# Altium PCB 8x8v2.PcbDoc (part 2 of 3)
Units mil, origin at the board's own origin, x right, y up, seen from the top; angles counter-clockwise.
Board outline 3661.42 x 3661.42 mil, 4 copper layers (Top Layer, VCC Plane, GND Plane, Bottom Layer), stack 30.635 mil thick; 389 components, 265 nets, 1171 pads, 321 vias.
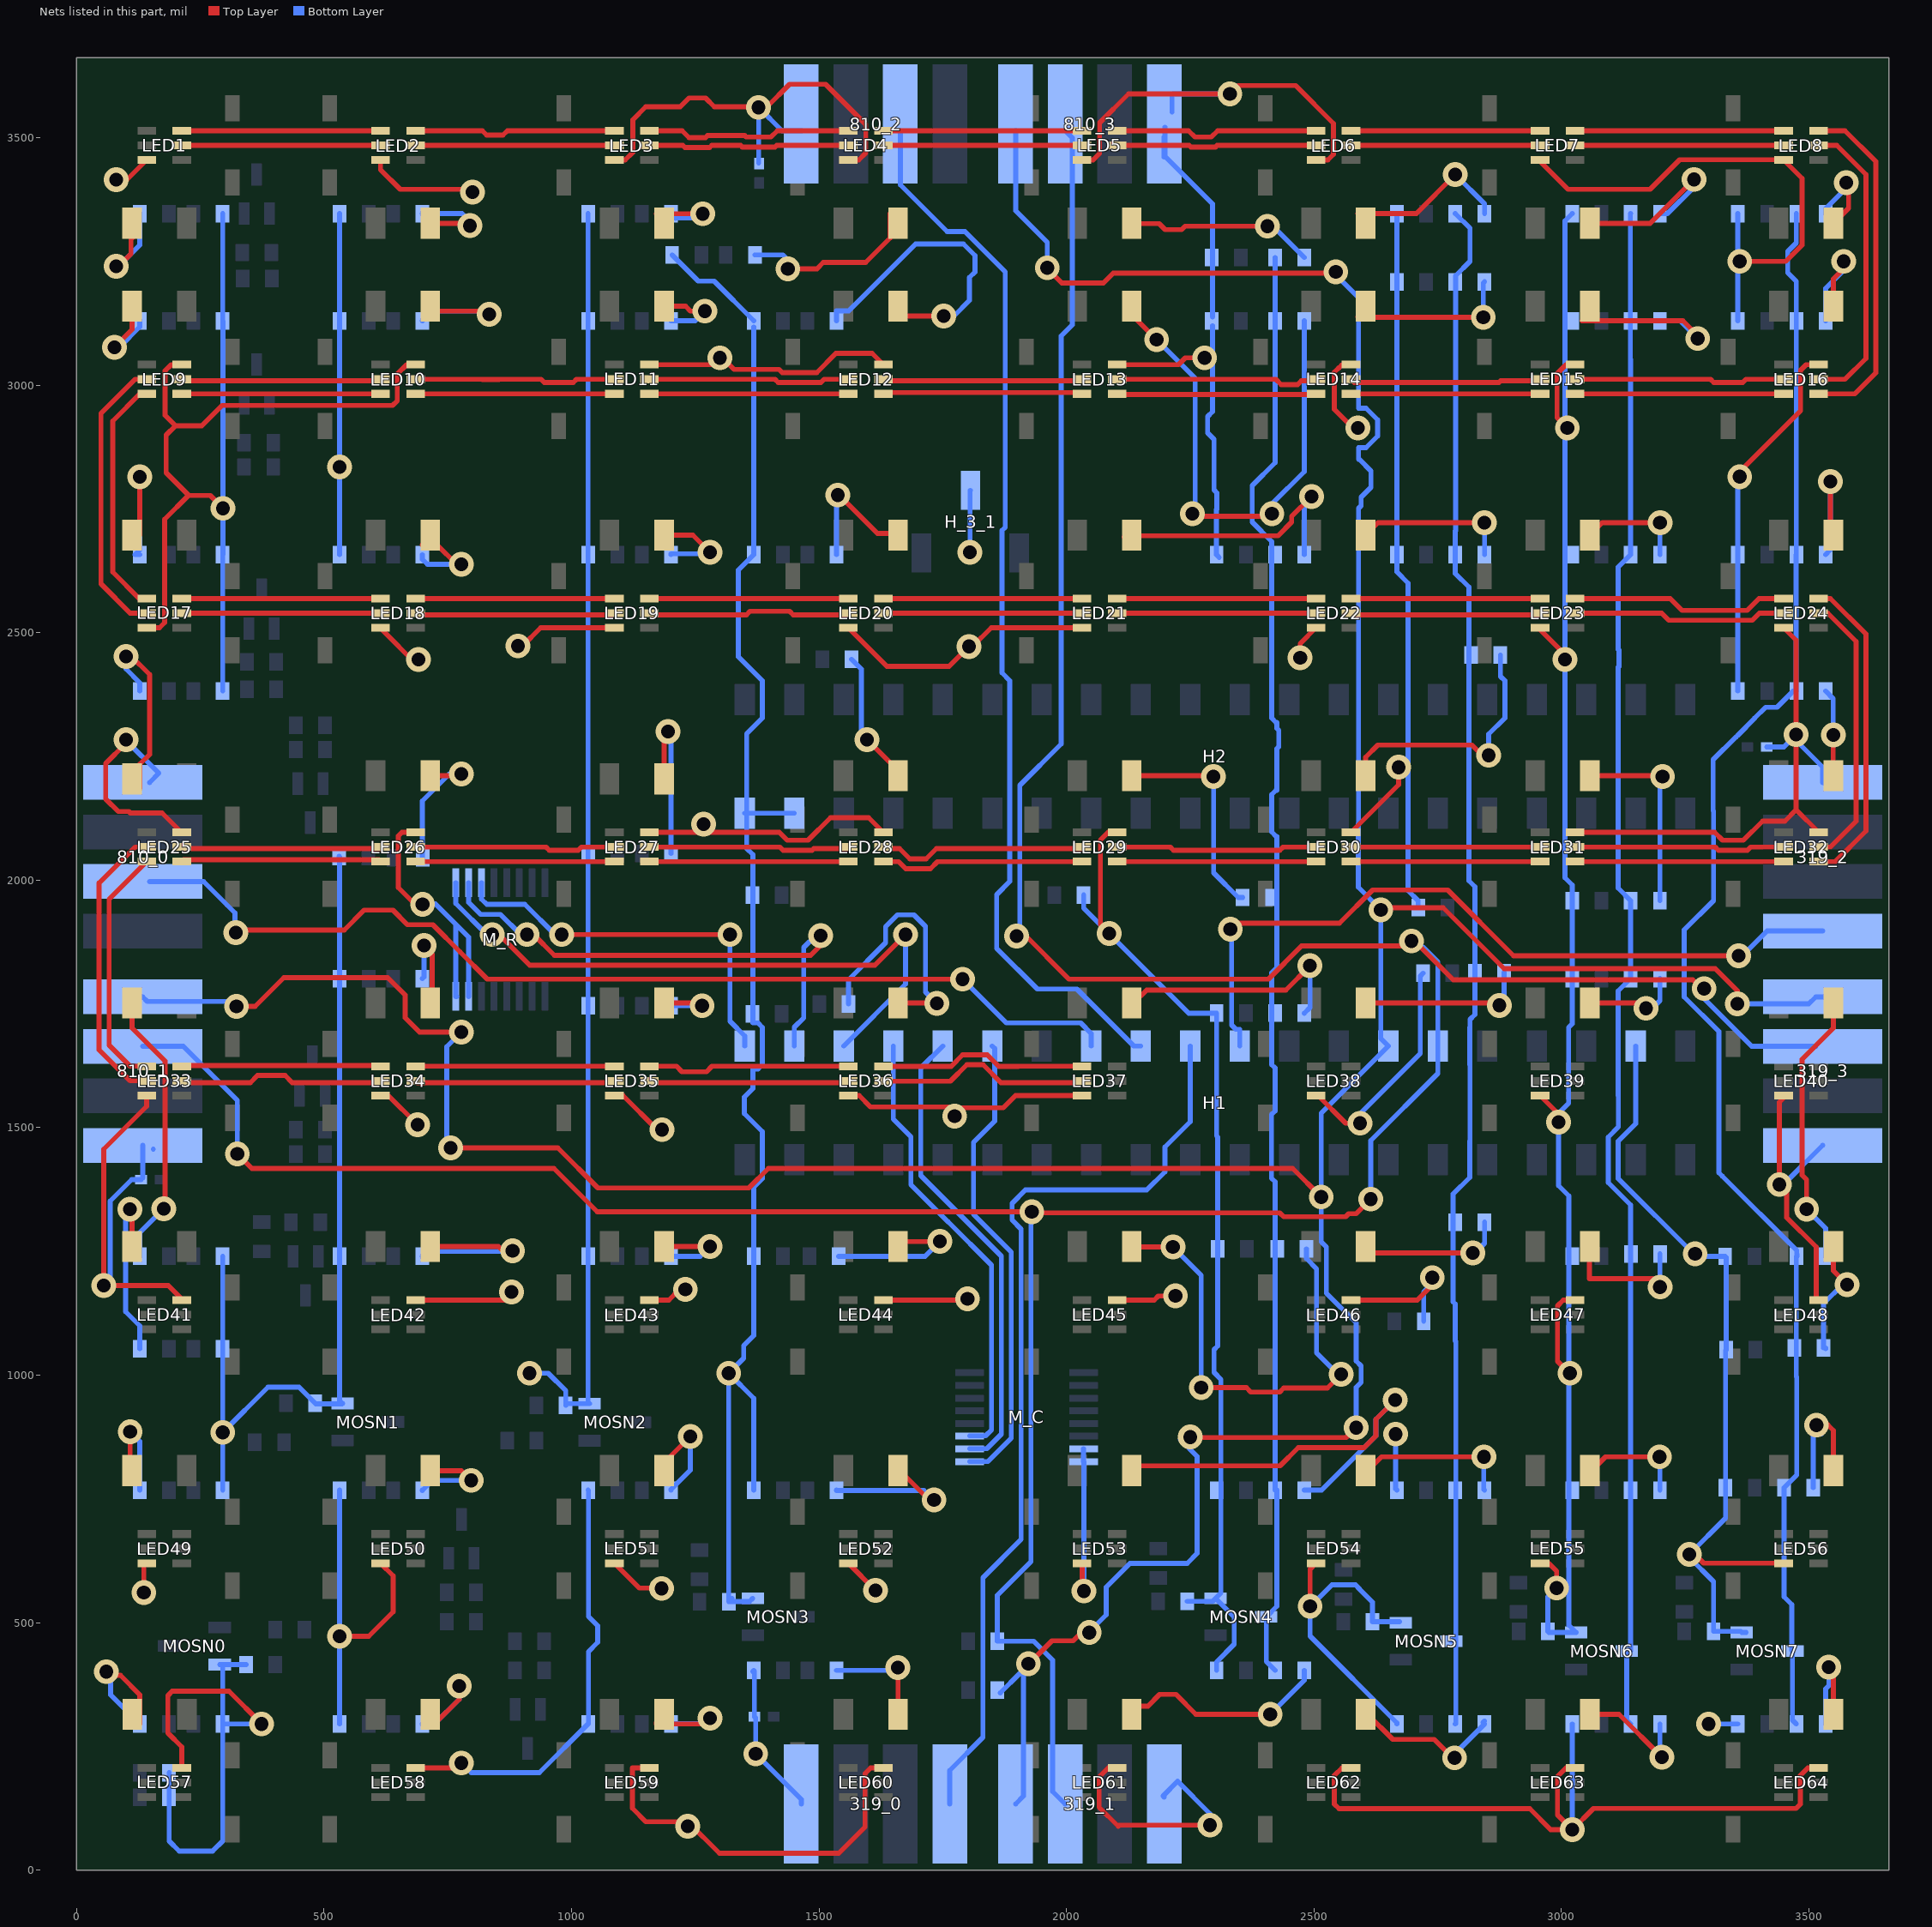
[diagram p4: the nets of this part, all layers, seen from the top]

## Via types
v1: diameter 50, hole 28, Top Layer to Bottom Layer, 321 vias

## Nets (pads, with @x,y where several pads share a name; then routed paths per layer and width w, separated by ;. In a path a pad name is that pad's centre, name@x,y a point inside that pad or via, vN(x,y) a via of type N, cw(c..) or ccw(c..) an arc to the next point about the centre after c; other vN are vias at no path point) (continued)
COL4: IR_R5.1 IR_R13.1 IR_R21.1 IR_R29.1 IR_R37.1 IR_R45.1 IR_R53.1 IR_R61.1 MOSN4.3 | length 2942.4
  Bottom Layer w10: IR_R61.1@2421.26,403.54 2403.54,421.26 MOSN4.3@2403.54,511.81 2425,533.27 2425,767.72 IR_R53.1@2421.26,767.72 2421.26,1390.53 2414,1397.79 2414,1526.57 2421.26,1533.83 2421.26,1620.53 2414.5,1627.29 2414.5,1812.93 2425,1823.43 2425,2088.5 2423.29,2088.5 2414.5,2097.29 2414.5,2172.71 2423.29,2181.5 2425,2181.5 2425,2265.43 2429,2269.43 2429,2302.57 2425,2306.57 2425,2318.5 2423.29,2318.5 2414.5,2327.29 2414.5,2683.93 2375,2723.43 2375,2796.86 2421.26,2843.12 IR_R5.1@2421.26,3257.87
COL5: IR_R6.1 IR_R14.1 IR_R22.1 IR_R30.1 IR_R38.1 IR_R46.1 IR_R54.1 IR_R62.1 MOSN5.3 | length 3125.8
  Bottom Layer w10: MOSN5.3@2777.56,462.6 MOSN5.3@2786.38,471.42 ; IR_R62.1@2785.43,295.28 2786.38,296.22 MOSN5.3@2786.38,471.42 ; IR_R6.1@2785.43,3346.46 2815,3316.89 2815,3250 2786,3221 2786,2706 2785.43,2705.43 IR_R22.1@2785.43,2657.48 2785.43,2619.57 2813,2592 2813,1998.79 2825,1986.79 2825,1728.43 2815,1718.43 2815,1703.21 2814.5,1702.71 2814.5,1627.29 2815,1626.79 2815,1473.21 2814.5,1472.71 2814.5,1399.5 2781,1366 2781,1148.02 2785.43,1143.58 2785.43,1069.1 2786.38,1068.16 MOSN5.3@2786.38,471.42
COL6: IR_R7.1 IR_R15.1 IR_R23.1 IR_R31.1 IR_R39.1 IR_R47.1 IR_R55.1 IR_R63.1 MOSN6.3 | length 3118.2
  Bottom Layer w10: MOSN6.3@3131.89,442.91 3131.89,303.15 IR_R63.1@3139.76,295.28 ; IR_R39.1@3139,1801.94 IR_R39.1@3139.76,1801.18 ; IR_R39.1@3139.13,1800.55 IR_R39.1@3139.76,1801.18 ; MOSN6.3@3139.76,442.91 IR_R55.1@3139.76,767.72 3139.76,1343.74 3094.5,1389 3094.5,1481 3115,1501.5 3115,1564.14 3114.5,1564.64 3114.5,1775.92 IR_R39.1@3139.76,1801.18 ; IR_R7.1@3139,3345.69 IR_R7.1@3139.76,3346.46 IR_R7.1@3139,3345.69 ; IR_R7.1@3139,3345.69 3139,3052.43 3139.76,3051.67 IR_R23.1@3139.76,2657.48 3114.5,2632.22 3114.5,2466.07 3116,2464.57 3116,2431.43 3114.5,2429.93 3114.5,1983.93 IR_R31.1@3139.76,1958.66 IR_R39.1@3139.76,1801.18
COL7: IR_R8.1 IR_R16.1 IR_R24.1 IR_R32.1 IR_R40.1 IR_R48.1 IR_R56.1 IR_R64.1 MOSN7.3 | length 3293.2
  Bottom Layer w10: IR_R64.1@3474.41,295.28 3466.53,303.15 MOSN7.3@3466.53,442.91 3465.19,444.26 3465.19,536.38 3449.41,552.16 IR_R56.1@3449.41,772.72 3475,798.31 3475,996.57 3474.41,997.16 IR_R40.1@3474.41,1240.16 ; IR_R8.1@3474.41,3346.46 3474.41,3287.41 3457,3270 3457,3227 3474.41,3209.59 IR_R24.1@3474.41,2657.48 3473.77,2656.84 3473.77,2382.53 IR_R32.1@3474.41,2381.89 3468.06,2381.89 3435.35,2349.17 3412.17,2349.17 3390,2327 3390,2326.55 3357.29,2293.84 3352.45,2289 3352,2289 3306.46,2243.46 3306.46,2140.4 3307,2139.85 3307,1958.57 3248,1899.57 3248,1764.15 3318,1694.15 3318,1409 3325,1402 3475.13,1251.87 IR_R40.1@3475.38,1240.18
GND: 319_0.4 319_1.1 319_2.4 319_3.1 810_0.4 810_1.1 810_2.4 810_3.1 C1.1 C2.1 C3.1 C4.1 H1.2 H2.39 H2.40 H_3_1.2 LED1.GND LED2.GND LED3.GND LED4.GND LED5.GND LED6.GND LED7.GND LED8.GND LED9.GND LED10.GND LED11.GND LED12.GND LED13.GND LED14.GND LED15.GND LED16.GND LED17.GND LED18.GND LED19.GND LED20.GND LED21.GND LED22.GND LED23.GND LED24.GND LED25.GND LED26.GND LED27.GND LED28.GND LED29.GND LED30.GND LED31.GND LED32.GND LED33.GND LED34.GND LED35.GND LED36.GND LED37.GND LED38.GND LED39.GND LED40.GND LED41.GND LED42.GND LED43.GND LED44.GND LED45.GND LED46.GND LED47.GND LED48.GND LED49.GND LED50.GND LED51.GND LED52.GND LED53.GND LED54.GND LED55.GND LED56.GND LED57.GND LED58.GND LED59.GND LED60.GND LED61.GND LED62.GND LED63.GND LED64.GND M_C.7 M_C.8 M_R.7 M_R.8 MOSN0.2 MOSN1.2 MOSN2.2 MOSN3.2 MOSN4.2 MOSN5.2 MOSN6.2 MOSN7.2 PT_R1.1 PT_R2.1 PT_R3.1 PT_R4.1 PT_R5.1 PT_R6.1 PT_R7.1 PT_R8.1 PT_R9.1 PT_R10.1 PT_R11.1 PT_R12.1 PT_R13.1 PT_R14.1 PT_R15.1 PT_R16.1 PT_R17.1 PT_R18.1 PT_R19.1 PT_R20.1 PT_R21.1 PT_R22.1 PT_R23.1 PT_R24.1 PT_R25.1 PT_R26.1 PT_R27.1 PT_R28.1 PT_R29.1 PT_R30.1 PT_R31.1 PT_R32.1 PT_R33.1 PT_R34.1 PT_R35.1 PT_R36.1 PT_R37.1 PT_R38.1 PT_R39.1 PT_R40.1 PT_R41.1 PT_R42.1 PT_R43.1 PT_R44.1 PT_R45.1 PT_R46.1 PT_R47.1 PT_R48.1 PT_R49.1 PT_R50.1 PT_R51.1 PT_R52.1 PT_R53.1 PT_R54.1 PT_R55.1 PT_R56.1 PT_R57.1 PT_R58.1 PT_R59.1 PT_R60.1 PT_R61.1 PT_R62.1 PT_R63.1 PT_R64.1 Rcg0.2 Rcg1.2 Rcg2.2 Rcg3.2 Rcg4.2 Rcg5.2 Rcg6.2 Rcg7.2 ROUT0.1 ROUT1.1 | length 40333
  Top Layer w10: v1(80,3415) 102.01,3415 LED1.GND@141.74,3454.72 ; v1@98.43,2283.46 98.43,2275.15 59.06,2235.78 59.06,2163.83 84.34,2138.54 105.55,2138.54 108.27,2135.83 172.63,2135.83 212,2096.46 LED25.GND@212.6,2096.46 ; v1(136,561) 136,614.34 LED49.GND@141.74,620.08 ; LED33.GND@141.74,1564.96 141.74,1543.02 55,1456.28 v1(55,1181) 185.39,1181 212.6,1153.79 LED41.GND@212.6,1151.58 ; LED17.GND@141.74,2509.84 167.84,2509.84 178,2520 178,2728.74 226.2,2776.94 270.06,2776.94 v1(296,2751) ; LED57.GND@212.6,206.7 212.6,249.1 184.45,277.25 184.45,352.67 193.23,361.46 307.83,361.46 v1(374.02,295.28) ; LED9.GND@212.6,3041.34 191.34,3041.34 178.9,3028.9 178.9,2939.1 200,2918 ; 227,2776.94 181,2822.94 181,2899 200,2918 ; v1(531.5,472.44) 590.55,472.44 639.76,521.65 639.76,594.49 LED50.GND@614.18,620.08 ; LED18.GND@613.67,2509.33 691,2432 v1(691,2446) ; LED34.GND@614.18,1564.96 629.92,1564.96 v1(688.98,1505.91) 688.98,1513.79 v1@687.02,1515.75 ; LED2.GND@614.18,3454.72 614.18,3435.04 653.86,3395.35 794.44,3395.35 800,3400.91 v1(800,3390) ; LED58.GND@685.04,206.7 767.72,206.7 v1(777.56,216.54) ; LED42.GND@685.04,1151.58 871.58,1151.58 879,1159 v1(879,1168) ; LED26.GND@685.04,2096.46 657.28,2096.46 650,2089.17 650,1985 684,1951 v1(699,1951) ; LED10.GND@685.04,3041.34 666.78,3041.34 647.88,3022.44 647.88,2968.19 638.58,2958.9 293.98,2958.9 253.09,2918 200,2918 ; v1(892,2473) 901,2473 937.84,2509.84 LED19.GND@1086.62,2509.84 ; LED51.GND@1086.62,620.08 1136.69,570 1175,570 1182,577 v1(1182,569) ; LED35.GND@1086.62,1564.96 1104.04,1564.96 1173,1496 v1(1183,1496) ; LED3.GND@1086.62,3454.72 1108.5,3454.72 1123.78,3470 1123.78,3535.78 1150,3562 1219.43,3562 1237.43,3580 1270.57,3580 1288.57,3562 1395.12,3562 1440.64,3607.52 1513.11,3607.52 1594.49,3526.14 1594.49,3469 1580.21,3454.72 LED4.GND@1559.06,3454.72 ; LED59.GND@1157.48,206.7 1123,206.7 1123,125 1150,98 1235,98 1298.79,34.21 1540.21,34.21 1593,87 1593,195.36 1604.33,206.7 LED60.GND@1629.92,206.7 ; LED43.GND@1157.48,1151.58 1196.58,1151.58 1218,1173 v1(1230,1173) ; LED27.GND@1157.48,2096.46 1419.73,2096.46 1435.72,2080.47 1477.67,2080.47 1523.2,2126 1600.38,2126 LED28.GND@1629.92,2096.46 ; LED11.GND@1157.48,3041.34 1299.22,3041.34 1300,3042.13 v1(1300,3055) 1305.24,3055 1328.42,3031.81 1419.42,3031.81 1425.87,3025.35 1495.28,3025.35 1534.14,3064.22 1607.04,3064.22 LED12.GND@1629.92,3041.34 ; LED52.GND@1559.06,620.08 v1(1614.17,564.96) ; LED36.GND@1559.06,1564.96 1581.04,1564.96 1604,1542 v1@1776,1542 ; LED20.GND@1559.06,2509.84 1637,2431.9 1762.9,2431.9 v1(1803,2472) 1810,2472 1847.84,2509.84 LED21.GND@2031.5,2509.84 ; LED44.GND@1629.92,1151.58 1797.58,1151.58 v1(1800,1154) ; v1@1768,1523.39 v1@1776,1531.39 ; v1@1774,1529.39 v1(1774,1523) 1774,1524.77 v1@1776,1526.77 ; v1@1782.23,1533 1789.23,1540 1872.16,1540 1897.12,1564.96 LED37.GND@2031.5,1564.96 ; LED53.GND@2031.5,620.08 2031.5,588.5 2040,580 2035,575 v1(2035,564) ; LED5.GND@2031.5,3454.72 2053.65,3454.72 2066.93,3468 2066.93,3529.93 2125,3588 v1(2330,3588) 2347,3605 2463,3605 2539.37,3528.63 2539.37,3466 2528.09,3454.72 LED6.GND@2503.94,3454.72 ; v1(2086,1892) 2068.66,1909.34 2068.66,2081.02 2084.1,2096.46 LED29.GND@2102.36,2096.46 ; LED61.GND@2102.36,206.7 2084.1,206.7 2066,188.59 2066,126.91 2104.33,88.58 2106.75,91 v1(2290,91) ; LED45.GND@2102.36,1151.58 2177,1151.58 2185.42,1160 v1(2220,1160) ; LED13.GND@2102.36,3041.34 2226.22,3041.34 2239.88,3055 v1(2279,3055) ; v1(2472,2449) 2472,2477.9 LED22.GND@2503.94,2509.84 ; v1(2492,533) 2492,608.14 LED54.GND@2503.94,620.08 ; LED38.GND@2503.94,1564.96 2507.94,1564.96 2563.9,1509 v1(2593,1509) ; LED62.GND@2574.8,206.7 2556.54,206.7 2541.1,191.25 2541.1,133.55 2550.4,124.25 2935.75,124.25 2978,82 v1(3021.65,82) ; LED46.GND@2574.8,1151.58 2708.58,1151.58 2745,1188 2739,1194 v1(2739,1197) ; LED14.GND@2574.8,3041.34 2556.96,3041.34 2550.31,3034.69 2549.89,3034.69 2541.1,3025.9 2541.1,3025.48 2541,3025.38 2541,2951.13 v1@2594.56,2897.56 ; LED30.GND@2576.46,2096.46 LED30.GND@2574.8,2096.46 2671,2192.66 v1(2671,2228) ; LED55.GND@2956.7,620.08 2974,620.08 2990,604.08 v1(2990,570) ; LED39.GND@2956.7,1564.96 2994,1527.65 v1(2994,1511) ; LED23.GND@2956.7,2509.84 2956.7,2505.8 3007,2455.5 v1(3007,2446) ; LED7.GND@2956.7,3454.72 2956.7,3451.66 3013,3395.35 3178.82,3395.35 3238.82,3455.35 3448.19,3455.35 LED8.GND@3448.82,3454.72 3486,3417.54 3486,3283 3453,3250 v1(3360,3250) ; v1(3011.81,2913.39) 2991,2934.2 2991,3023.04 3009.3,3041.34 LED15.GND@3027.56,3041.34 ; v1(3017,1004) 3016,1004 2992,1028 2992,1140 3003.58,1151.58 LED47.GND@3027.56,1151.58 ; LED63.GND@3027.56,206.7 3009.3,206.7 2992,189.4 2992,111.65 v1(3021.65,82) ; LED31.GND@3027.56,2096.46 3309.49,2096.46 3325.48,2080.47 3367.43,2080.47 3406.3,2119.33 3451.19,2119.33 3474,2142.14 ; v1@3248.03,639.76 3267.71,639.76 3287.4,620.08 LED56.GND@3448.82,620.08 ; v1@3343.83,2809 3483,2948.17 3483,3030 3494.34,3041.34 LED16.GND@3519.68,3041.34 ; LED40.GND@3448.82,1564.96 3448.82,1560.2 3440,1551.38 v1(3440,1385) 3455,1370 3455,1318.43 3514.53,1258.9 3514.53,1156.73 LED48.GND@3519.68,1151.58 ; LED24.GND@3448.82,2509.84 3474,2484.66 v1(3474,2294) 3474,2142.14 ; LED64.GND@3519.68,206.7 3497.7,206.7 3482.52,191.52 3482.52,133.55 3473.74,124.76 3064.41,124.76 v1(3021.65,82) ; LED32.GND@3519.68,2096.46 3474,2142.14
  Bottom Layer w10: v1(55,1181) 68,1194 68,1351.57 111.43,1395 C3.1@130.32,1395 133.86,1398.54 810_1.1@133.86,1464.17 ; v1@98.43,2283.46 98.83,2283.46 166.35,2215.95 810_0.4@147.64,2197.24 ; ROUT0.1@187.01,196.85 187.01,59.06 207.32,38.74 274.96,38.74 275.59,39.37 295.28,59.05 PT_R57.1@295.28,295.28 ; MOSN0.2@289.37,415.36 MOSN0.2@295.28,415.36 ; PT_R49.1@295.28,767.72 v1(295.27,884.27) ; PT_R41.1@295.27,1053.15 v1(295.27,884.27) ; PT_R41.1@295.28,1053.15 PT_R33.1@295.28,1240.16 ; PT_R25.1@295.28,2381.89 PT_R17.1@295.28,2657.48 296,2658.2 v1(296,2751) 296,3129.2 PT_R9.1@295.28,3129.92 PT_R1.1@295.28,3346.46 ; Rcg0.2@342.52,415.35 MOSN0.2@295.28,415.36 ; v1(374.02,295.28) PT_R57.1@295.28,295.28 ; PT_R26.1@530.47,2048 531.49,2046.98 PT_R42.1@531.5,1240.16 531.49,948.82 MOSN1.2@537.4,942.91 536.28,941.79 483.41,941.79 449.57,975.63 386.63,975.63 v1(295.27,884.27) ; PT_R58.1@531.5,295.28 v1(531.5,472.44) ; 531.5,631.5 v1(531.5,472.44) ; PT_R50.1@531.5,767.72 v1(531.5,472.44) ; PT_R18.1@531.5,2657.48 v1(531.5,2834.65) PT_R10.1@531.5,3129.92 PT_R2.1@531.5,3346.46 ; v1(699,1951) 724.17,1951 725.17,1952 766.3,1910.87 ; M_R.8@766.3,1764.92 766.3,1910.87 ; v1(777.56,216.54) 797.24,196.85 935.04,196.85 PT_R59.1@1033.46,295.28 1034.09,295.91 1034.09,441.53 1053,460.43 1053,493.57 1034.09,512.47 1034.09,767.09 PT_R51.1@1033.46,767.72 ; M_R.7@792.3,1764.92 792.3,1884.87 766.3,1910.87 ; v1(915,1004) 953,1004 988.19,968.81 Rcg2.2@988.19,938.98 991.47,942.26 MOSN2.2@1036.42,942.26 1033.46,945.21 PT_R3.1@1033.46,3346.46 ; PT_R4.1@1203.11,3262.87 1255.83,3210.16 1287.87,3210.16 PT_R12.1@1368.11,3129.92 ; Rcg3.2@1324.27,549.21 Rcg3.2@1317.58,542.52 ; H2.40@1350,2135 H2.40@1354,2135 ; PT_R60.1@1366.14,401.57 PT_R60.1@1368.11,403.54 1369.32,402.34 C1.1@1369.32,310 1372,307.31 v1(1372,235) 1464.17,142.83 319_0.4@1464.17,133.86 ; MOSN3.2@1366.14,549.21 1359.45,542.52 Rcg3.2@1317.58,542.52 ; PT_R52.1@1368.11,767.72 1368.11,953.4 v1(1317.58,1003.94) ; PT_R12.1@1368.11,3117.59 PT_R20.1@1368.11,2657.48 1337,2626.37 1337,2451.21 1385.5,2402.71 1385.5,2327.29 1354,2295.79 H2.40@1354,2135 ; C4.1@1377.95,3448.69 v1(1377.95,3561) 1425.17,3513.78 810_2.4@1464.17,3513.78 ; H2.39@1450,2135 H2.40@1354,2135 ; v1(1805,2662) 1805,2786.58 H_3_1.2@1805.8,2787.39 ; M_C.7@2034.29,851.35 M_C.8@2034.29,825.35 2035,824.65 v1(2035,564) ; PT_R29.1@2034.53,1970 2034.53,1943.47 2246.82,1731.18 PT_R37.1@2303.15,1731.18 2303.15,1483.35 2305.5,1481 2305.5,1059.07 2298,1051.57 2298,1005.57 2312,991.57 2312,560.03 MOSN4.2@2301.18,549.21 ; 319_1.1@2197.24,147.64 2194.88,150 2224.41,179.53 2290,113.94 v1(2290,91) ; 810_3.1@2197.24,3460.48 810_3.1@2197.24,3501.24 ; 810_3.1@2199,3521 2199,3462 2295,3366 PT_R13.1@2295,3137.77 ; 810_3.1@2213,3551.43 2213,3584.57 2216.43,3588 v1(2330,3588) ; Rcg4.2@2244.09,543.31 2295.28,543.31 MOSN4.2@2301.18,549.21 ; PT_R13.1@2295,3119.96 2295,2946.57 2285,2936.57 2285,2903.43 2298,2890.43 2298,2788.1 2303.78,2782.32 2303.78,2749.18 2303,2748.4 2303,2657.48 2303.15,2657.48 PT_R21.1@2308.57,2652.06 ; PT_R61.1@2303.15,403.54 2303.15,420.71 2338.82,456.39 2338.82,511.57 MOSN4.2@2301.18,549.21 ; v1(2593,1509) 2586,1509 2580,1515 2714.5,1649.5 2714.5,1806.03 PT_R38.1@2720.47,1812 ; v1(2665,881) 2665,770.04 PT_R54.1@2667.32,767.72 ; PT_R62.1@2667.32,295.28 2667.32,297.53 2492,472.85 v1(2492,533) 2492.82,533 2536.07,576.25 2583.93,576.25 2592.72,567.47 2592.72,566.73 2618.11,541.34 Rcg5.2@2618.11,501.97 MOSN5.2@2672.71,501.97 ; PT_R6.1@2667.32,3346.46 PT_R22.1@2667.32,2657.48 2667.32,2622.68 2690,2600 2690,1979 2710.47,1958.53 PT_R30.1@2710.47,1945 ; PT_R46.1@2721.53,1109 2721.53,1168.1 v1@2745,1191.57 ; v1@2985.07,1519.93 3014.5,1549.35 3014.5,1702.71 3021.65,1709.87 3021.65,1990.13 3007,2004.79 v1(3007,2446) 3007,3331.8 PT_R7.1@3021.65,3346.46 ; v1(2990,570) 2972.44,552.44 Rcg6.2@2972.44,482.28 2974.41,480.31 MOSN6.2@3029.53,480.31 3015,494.84 3015,1362 2994,1383 v1(2994,1511) ; v1@3021.65,88.58 PT_R63.1@3021.65,295.28 ; H1.2@3150,1665 3150,1508.21 3114.5,1472.71 3114.5,1397.29 3266.79,1245 v1(3270,1245) 3275,1240 PT_R40.1@3330.47,1240 3332.6,1237.87 PT_R48.1@3332.6,1051.3 3331.3,1050 PT_R56.1@3331.3,772.72 3331.3,711.3 v1(3258,638) 3258,632 3307.08,582.92 Rcg7.2@3307.08,482.28 3362.2,482.28 MOSN7.2@3364.17,480.31 MOSN7.2@3373,480.31 ; v1(3297.24,295.28) PT_R64.1@3356.3,295.28 ; PT_R32.1@3356.3,2381.89 PT_R24.1@3356.3,2657.48 3356.3,2811.3 v1(3360,2815) ; PT_R16.1@3356.3,3129.92 PT_R8.1@3356.3,3346.46 ; C2.1@3414.69,2269 3449,2269 v1(3474,2294) 3474,2282 3527.56,2228.44 319_2.4@3527.56,2197.24 ; v1(3440,1385) 3448.39,1385 319_3.1@3527.56,1464.17 ; PT_R57.1@295.28,295.28 MOSN0.2@295.28,415.36 ; Rcg3.2@1317.58,542.52 v1(1317.58,1003.94) ; v1(1317.58,1003.94) 1347.8,1034.15 1347.8,1059.88 1368.11,1080.19 PT_R44.1@1368.11,1240.16 1368.11,1379.9 1385.5,1397.29 1385.5,1491.93 1349,1528.43 1349,1561.57 1366.47,1579.04 1366.47,1618.5 1376.71,1618.5 1385.5,1627.29 1385.5,1702.71 1376.71,1711.5 1366.47,1711.5 1366.47,2051.47 1354,2063.95 H2.40@1354,2135
  other v1: 1235,88.58 1267,2113 100,2283.46 2588.58,2913.39
I2C_1: 319_1.4 319_3.4 810_1.4 810_3.4 H1.7 R200.2 | length 8771.4
  Top Layer w10: v1(323,1745) 361,1745 419,1803 629,1803 664,1768 664,1722 693.09,1692.91 v1(777.56,1692.91) ; v1(756,1459) 972.1,1459 1053.15,1377.95 1358.27,1377.95 1397.64,1417.32 2457.18,1417.32 v1(2514.5,1360) ; v1@1907.99,417 v1(1923,417) ; v1@1909.5,403.5 1910,403 1970.54,463.54 2013.54,463.54 2030,480 v1(2046,480) ; v1(1961,3237) 1961,3235.54 1990.54,3206 2074.57,3206 2094.57,3226 2541,3226 v1(2544,3229) ; v1(2250,875) 2251,874 2565,874 v1(2585,894) ; v1(2635,1940) 2639,1944 2761,1944 2884,1821 3310.57,1821 3355,1776.57 v1(3355,1750)
  Bottom Layer w10: 810_1.4@133.86,1764.17 143.03,1755 326,1755 323,1752 v1(323,1745) ; v1(756,1459) 748.03,1466.97 748.03,1663.39 v1(777.56,1692.91) ; R200.2@1866.24,358.17 1905.61,397.54 ; 319_1.4@1897.24,133.86 1913.06,149.68 1913.06,417 v1(1923,417) ; 810_3.4@1897.24,3513.78 1897.24,3352.24 1961,3288.48 v1(1961,3237) ; v1@2038.33,474 2080,515.67 2080,571.57 2128.43,620 2244,620 2264,640 2264,836 2230,870 2235,875 v1(2250,875) ; v1(2544,3229) 2540.74,3229 2539.37,3227.63 2590,3177 2590,2953.39 2605.15,2953.39 2628.58,2929.95 2628.58,2896.82 2605.15,2873.39 2590,2873.39 2590,2850 2591.57,2850 2615,2826.57 2615,2793.43 2595,2773.43 2595,2756.21 2590,2751.21 2590,2114.65 2589.39,2114.04 2589.39,1985.61 v1(2635,1940) 2635,1680 H1.7@2650,1665 2514.5,1529.5 v1(2514.5,1360) 2514.5,1269.41 2525,1258.91 2525,1165.63 2585,1105.63 2585,1028.57 2595,1018.57 2595,985.43 2585,975.43 v1(2585,894) ; v1(3355,1750) 3499.61,1750 3513.78,1764.17 319_3.4@3527.56,1764.17
I2C_2: 319_1.3 319_3.3 810_1.3 810_3.3 H1.6 R201.2 | length 8039.4
  Top Layer w10: v1(324.8,1446.85) 354.33,1417.32 964.57,1417.32 1051.89,1330 v1(1930,1330) 1931.93,1328.07 2430.53,1328.07 2438.6,1320 2563.81,1320 2570.15,1326.34 2585.34,1326.34 v1(2614.5,1355.5) ; v1@1899,1893 1912,1893 2005,1800 2407.89,1800 2474.89,1867 2687,1867 v1(2697,1877) ; v1@2715,1865 2781.54,1798.46 3265.2,1798.46 3283.66,1780 3284.66,1781 v1(3288,1781)
  Bottom Layer w10: 810_1.3@133.86,1664.17 215.75,1664.17 324.8,1555.12 v1(324.8,1446.85) ; v1@1911,1894 1905.5,1899.5 1905.5,2191.5 1989,2275 1989,3099.36 2011.54,3121.9 2011.54,3499.49 810_3.3@1997.24,3513.78 ; v1(1930,1330) 1928.29,1328.29 1928.29,623.29 1860.24,555.24 R201.2@1860.24,462.6 1933.97,462.6 1972,424.57 1972,159.1 319_1.3@1997.24,133.86 ; v1(2614.5,1355.5) 2614.5,1473.93 2750,1609.43 H1.6@2750,1665 2750,1835.18 2720.18,1865 ; v1(3288,1781) 3288,1760.43 3384.26,1664.17 319_3.3@3513.78,1664.17
  other v1: 1899,1887
M_CS0: H1.17 M_C.11 | length 907.2
  Bottom Layer w10: H1.17@1650,1665 1650,1517 1685.5,1481.5 1685.5,1384.5 1760,1310 1760.57,1310 1848.29,1222.28 1848.29,889.14 1836.5,877.35 M_C.11@1804.29,877.35
M_CS1: H1.16 M_C.10 | length 946.2
  Bottom Layer w10: H1.16@1750,1665 1705.5,1620.5 1705.5,1403.08 1868.29,1240.29 1868.29,880.86 1838.79,851.35 M_C.10@1804.29,851.35
M_CS2: H1.15 M_C.9 | length 947.5
  Bottom Layer w10: M_C.9@1804.29,825.35 1841.07,825.35 1888.29,872.57 1888.29,1248.57 1812,1324.86 1812,1470.21 1855,1513.21 1855,1660 H1.15@1850,1665
M_RS0: H1.20 M_R.11 | length 802
  Top Layer w10: v1(980,1890) v1(1320,1890)
  Bottom Layer w10: M_R.11@818.3,1994.92 818.3,1961.7 829.08,1950.92 905.65,1950.92 966.57,1890 v1(980,1890) ; v1(1320,1890) 1320,1715 1350,1685 H1.20@1350,1665
M_RS1: H1.19 M_R.10 | length 1074.1
  Top Layer w10: v1(910,1890) 923.43,1890 965.43,1848 1483,1848 1503,1868 v1(1503,1888)
  Bottom Layer w10: M_R.10@792.3,1994.92 792.3,1954.92 816.3,1930.92 856.3,1930.92 897.22,1890 v1(910,1890) ; H1.19@1450,1665 1450,1702.76 1468.9,1721.66 1468.9,1863.9 1493,1888 v1(1503,1888)
M_RS2: H1.18 M_R.9 | length 1305.1
  Top Layer w10: v1(840,1890) 853.43,1890 915.43,1828 1613,1828 v1(1675,1890)
  Bottom Layer w10: M_R.9@766.3,1994.92 766.3,1952.64 828.94,1890 v1(840,1890) ; H1.18@1550,1665 1675,1790 v1(1675,1890)
Net319_0_1: 319_0.1 H1.11 | length 1891.2
  Bottom Layer w10: 319_0.1@1764.17,133.86 1764.17,201.6 1831,268.43 1831,590.84 1908.29,668.13 1908.29,1295.14 1890,1313.43 1890,1347 1917,1374 2162.21,1374 2199,1410.79 2199,1461 2250,1512 H1.11@2250,1665
Net319_2_1: 319_2.1 H1.10 | length 1561.1
  Top Layer w10: v1(2331,1901) 2331,1902 2342,1913 2551.43,1913 2618.43,1980 2770,1980 2903,1847 v1(3358,1847)
  Bottom Layer w10: v1(2331,1901) 2331,1902 2333.43,1904.43 2333.43,1707.25 2342.21,1698.46 2350,1698.46 H1.10@2350,1665 ; v1(3358,1847) 3365,1847 3415.24,1897.24 319_2.1@3527.56,1897.24
Net810_0_2: 810_0.2 H1.13 | length 2129.2
  Top Layer w10: v1@305.12,1899.61 305.75,1898.98 540.71,1898.98 581,1939.27 639.16,1939.27 668.43,1910 720,1910 775,1855 830,1800 v1(1790,1800)
  Bottom Layer w10: 810_0.2@147.64,1997.24 256.69,1997.24 320,1933.94 320,1914.49 v1@305.12,1899.61 ; v1(1790,1800) 1878.5,1711.5 2028.5,1711.5 2050,1690 H1.13@2050,1665
  other v1: 322,1894
Net810_2_2: 810_2.2 H1.12 | length 2153.4
  Bottom Layer w10: 810_2.2@1664.17,3513.78 1664.17,3404.72 1758.9,3310 1794.85,3310 1876,3228.85 1876,2712.65 1869.54,2706.2 1869.54,2418.67 1885.5,2402.71 1885.5,1997.29 1859,1970.79 1859,1862 1941,1780 2021,1780 2136,1665 H1.12@2150,1665
NetIR1_2: IR1.2 IR_R1.2 | length 244.9
  Top Layer w10: v1@85,3240 110,3265 110,3295 120.09,3305.09 112.2,3312.98 IR1.2@112.2,3326.77
  Bottom Layer w10: v1@73.67,3228.67 127.95,3282.95 IR_R1.2@127.95,3346.46
  other v1: 80,3240
NetIR2_2: IR2.2 IR_R2.2 | length 194.3
  Top Layer w10: IR2.2@714.57,3326.77 791.77,3326.77 795,3323.54 v1(795,3322)
  Bottom Layer w10: IR_R2.2@698.82,3346.46 778.54,3346.46 795,3330 v1(795,3322)
NetIR3_2: IR3.2 IR_R3.2 | length 167.2
  Top Layer w10: IR3.2@1171.26,3346.46 1171.26,3346 v1(1265,3346)
  Bottom Layer w10: IR_R3.2@1200.79,3346.46 IR_R3.2@1210.63,3336.62 ; IR_R3.2@1209.25,3338 1257,3338 v1(1265,3346)
NetIR4_2: IR4.2 IR_R4.2 | length 370.4
  Top Layer w10: v1(1437,3235) 1495.8,3235 1508.52,3247.72 1594.17,3247.72 1643.7,3297.24 IR4.2@1643.7,3346.46
  Bottom Layer w10: IR_R4.2@1370.43,3262.87 1427.13,3262.87 1437,3253 v1(1437,3235)
NetIR5_2: IR5.2 IR_R5.2 | length 380.6
  Top Layer w10: IR5.2@2135.83,3326.77 2136.46,3326.14 2187.3,3326.14 2199.43,3314 2232.57,3314 2239.57,3321 v1(2406,3321)
  Bottom Layer w10: v1(2406,3321) 2412.81,3321 2415,3323.19 IR_R5.2@2480.32,3257.87
NetIR6_2: IR6.2 IR_R6.2 | length 332.7
  Top Layer w10: IR6.2@2588.58,3346.46 2706.69,3346.46 v1(2785.43,3425.2)
  Bottom Layer w10: v1(2785.43,3425.2) 2844.49,3366.14 IR_R6.2@2844.49,3346.46
NetIR7_2: IR7.2 IR_R7.2 | length 354.4
  Top Layer w10: IR7.2@3057.09,3326.77 3179.13,3326.77 v1(3267.72,3415.35)
  Bottom Layer w10: IR_R7.2@3198.82,3346.46 3198.82,3346 3213.72,3346 3267.72,3400 v1(3267.72,3415.35)
NetIR8_2: IR8.2 IR_R8.2 | length 185.3
  Top Layer w10: IR8.2@3549.21,3326.77 3580,3357.56 3580,3398 3569,3409 v1(3575,3409)
  Bottom Layer w10: IR_R8.2@3533.46,3346.46 3533.46,3356.46 3575,3398 v1(3575,3409)
NetIR9_2: IR9.2 IR_R9.2 | length 169.5
  Top Layer w10: v1(76.38,3076.38) 112.2,3112.2 IR9.2@112.2,3159.45
  Bottom Layer w10: v1@81.47,3085 v1@84.24,3085 ; v1@87.77,3077.76 127.95,3117.95 IR_R9.2@127.95,3129.92
NetIR10_2: IR10.2 IR_R10.2 | length 228.9
  Top Layer w10: IR10.2@718.5,3159.45 728.35,3149.61 v1@816.93,3149.61
  Bottom Layer w10: IR_R10.2@698.82,3129.92 698.82,3130 698.9,3129.91 718.59,3149.61 v1@816.93,3149.61
  other v1: 834,3143
NetIR11_2: IR11.2 IR_R11.2 | length 172.2
  Top Layer w10: IR11.2@1190.94,3159.45 1230.32,3159.45 1240.16,3149.61 v1(1269.68,3149.61)
  Bottom Layer w10: IR_R11.2@1200.79,3129.92 1250,3129.92 v1(1269.68,3149.61) v1@1269.68,3137.28
NetIR12_2: IR12.2 IR_R12.2 | length 615.9
  Top Layer w10: IR12.2@1661.46,3139.76 v1(1751.97,3139.76)
  Bottom Layer w10: IR_R12.2@1535.43,3129.92 1535.43,3150 1560,3150 1695,3285 1791.57,3285 1815,3261.57 1815,3228.43 1804,3217.43 1804,3171 1772.76,3139.76 v1(1751.97,3139.76)
NetIR13_2: IR13.2 IR_R13.2 | length 1051.6
  Top Layer w10: IR13.2@2131.89,3159.45 2131.89,3142.11 v1(2182,3092) ; v1@2260,2735 2410,2735 v1(2415,2740)
  Bottom Layer w10: v1(2182,3092) 2260,3014 v1@2260,2735 ; v1(2415,2740) 2415,2760 2480.31,2825.31 IR_R13.2@2480.32,3129.92
  other v1: 2254,2740
NetIR14_2: IR14.2 IR_R14.2 | length 326.5
  Top Layer w10: IR14.2@2588.58,3138 2589.58,3137 v1(2842,3137)
  Bottom Layer w10: v1(2842,3137) 2842,3206.17 IR_R14.2@2844.49,3208.66
NetIR15_2: IR15.2 IR_R15.2 | length 343.2
  Top Layer w10: IR15.2@3041.34,3129.92 3041.34,3130 3245,3130 3275,3100 v1(3275,3094)
  Bottom Layer w10: IR_R15.2@3198.82,3129.92 3239.08,3129.92 v1(3275,3094)
NetIR16_2: IR16.2 IR_R16.2 | length 249.2
  Top Layer w10: IR16.2@3549.21,3159.45 3549.21,3214.57 3570,3235.35 v1(3570,3250)
  Bottom Layer w10: IR_R16.2@3533.46,3129.92 3533.47,3195.46 3582.67,3244.67 3577.34,3250 v1(3570,3250)
NetIR17_2: IR17.2 IR_R17.2 | length 289.5
  Top Layer w10: IR17.2@127.95,2696.85 v1(127.95,2814.96)
  Bottom Layer w10: IR_R17.2@127.95,2657.48 118.11,2657.48 123.03,2662.4 127.95,2667.32 v1(127.95,2814.96)
NetIR18_2: IR18.2 IR_R18.2 | length 215.3
  Top Layer w10: IR18.2@718.5,2696.85 698.82,2677.16 728.35,2677.16 767.72,2637.8 v1(777.56,2637.8)
  Bottom Layer w10: IR_R18.2@698.82,2657.48 698.82,2648 709.02,2637.8 v1(777.56,2637.8)
NetIR19_2: IR19.2 IR_R19.2 | length 197
  Top Layer w10: IR19.2@1190.94,2696.85 1245.15,2696.85 v1(1280,2662)
  Bottom Layer w10: IR_R19.2@1200.79,2657.48 1200.79,2659.25 v1@1280,2659.25 ; v1@1267.49,2662 v1(1280,2662)
NetIR20_2: IR20.2 IR_R20.2 | length 264
  Top Layer w10: v1(1538,2778) 1538,2774.46 1540,2772.46 1543,2775.46 1618.16,2700.3 IR20.2@1643.7,2700.3
  Bottom Layer w10: IR_R20.2@1535.43,2657.48 1535.43,2775.43 v1(1538,2778)
NetIR21_2: IR21.2 IR_R21.2 | length 543.1
  Top Layer w10: IR21.2@2116.14,2693.14 2118.75,2695.75 2427.32,2695.75 2455,2723.43 2455,2735 v1(2495,2775)
  Bottom Layer w10: IR_R21.2@2480.32,2657.48 2480.32,2760.32 v1(2495,2775)
NetIR22_2: IR22.2 IR_R22.2 | length 314.6
  Top Layer w10: IR22.2@2604.33,2696.85 2629.48,2722 v1(2844,2722)
  Bottom Layer w10: IR_R22.2@2844.49,2657.48 v1@2844.49,2722
NetIR23_2: IR23.2 IR_R23.2 | length 216.9
  Top Layer w10: IR23.2@3057.09,2696.85 3082.24,2722 v1(3199,2722)
  Bottom Layer w10: IR_R23.2@3198.82,2657.48 3199,2657.66 v1(3199,2722)
NetIR24_2: IR24.2 IR_R24.2 | length 260
  Top Layer w10: IR24.2@3543.31,2696.85 v1(3543.31,2805.12)
  Bottom Layer w10: IR_R24.2@3533.46,2657.48 3543.31,2667.32 v1(3543.31,2805.12)
NetIR25_2: IR25.2 IR_R25.2 | length 383
  Top Layer w10: v1(100,2452) 111,2452 147.64,2415.36 147.64,2253.94 127.95,2234.25 IR25.2@127.95,2185.04
  Bottom Layer w10: v1(100,2452) 100,2426.43 127.95,2398.47 IR_R25.2@127.95,2381.89
NetIR26_2: IR26.2 IR_R26.2 | length 298.8
  Top Layer w10: IR26.2@714.57,2211.06 774.06,2211.06 v1(777.56,2214.57) v1@759.57,2214.57
  Bottom Layer w10: IR_R26.2@698.82,2045 698.82,2160 753.39,2214.57 v1(777.56,2214.57)
NetIR27_2: IR27.2 IR_R27.2 | length 358.4
  Top Layer w10: IR27.2@1187.01,2204.72 v1@1187.01,2292.01 ; v1@1187.01,2305.53 v1@1187.01,2292.01 ; v1(1195,2300) v1@1187.01,2292.01
  Bottom Layer w10: IR_R27.2@1200.79,2053.66 v1@1200.79,2300
NetIR28_2: IR28.2 IR_R28.2 | length 269.1
  Top Layer w10: v1(1597,2284) 1659.45,2221.55 IR28.2@1659.45,2211.06
  Bottom Layer w10: IR_R28.2@1565.53,2446 1585.5,2426.03 v1@1585.5,2284
NetIR29_2: IR29.2 IR_R29.2 | length 439.8
  Top Layer w10: IR29.2@2131.89,2211.06 2291.94,2211.06 2294,2209 v1(2297,2209)
  Bottom Layer w10: v1(2297,2209) 2297,2014.79 2346.79,1965 IR_R29.2@2355.97,1965
NetIR30_2: IR30.2 IR_R30.2 | length 525
  Top Layer w10: IR30.2@2604.33,2211.06 2604.33,2248.33 2629,2273 2819,2273 2840,2252 v1(2853,2252)
  Bottom Layer w10: v1(2853,2252) 2853,2294.79 2885.5,2327.29 2885.5,2402.71 2876.53,2411.69 IR_R30.2@2876.53,2455
NetIR31_2: IR31.2 IR_R31.2 | length 400.3
  Top Layer w10: IR31.2@3057.09,2211.06 3201.94,2211.06 v1(3204,2209)
  Bottom Layer w10: IR_R31.2@3198.82,1958.66 3198.82,2203.82 v1(3204,2209)
NetIR32_2: IR32.2 IR_R32.2 | length 177.3
  Top Layer w10: v1(3549,2293) 3549,2211.28 IR32.2@3549.21,2211.06
  Bottom Layer w10: IR_R32.2@3533.46,2381.89 3549,2366.35 v1(3549,2293)
NetIR33_2: IR33.2 IR_R33.2 | length 560.5
  Top Layer w10: IR33.2@112.2,1751.97 112.2,1701.34 178.9,1634.65 178.9,1338.9 v1(176,1336)
  Bottom Layer w10: IR_R33.2@127.95,1240.16 127.95,1287.95 v1(176,1336)
NetIR34_2: IR34.2 IR_R34.2 | length 191
  Top Layer w10: v1(702,1868) 702,1866.89 718.5,1850.39 IR34.2@718.5,1751.97
  Bottom Layer w10: IR_R34.2@698.82,1801.18 702,1804.36 v1(702,1868)
NetIR35_2: IR35.2 IR_R35.2 | length 146
  Top Layer w10: IR35.2@1190.94,1751.97 1250.03,1751.97 1262,1740 1263.82,1741.82 v1(1263.82,1746.18)
  Bottom Layer w10: IR_R35.2@1200.79,1746.18 v1(1263.82,1746.18)
NetIR36_2: IR36.2 IR_R36.2 | length 531.3
  Top Layer w10: IR36.2@1659.45,1751.97 1737.03,1751.97 v1(1738,1751)
  Bottom Layer w10: IR_R36.2@1559.53,1750 1559.53,1798.47 1634.49,1873.43 1634.49,1906.06 1658.43,1930 1691.57,1930 1715,1906.57 1715,1774 v1(1738,1751)
NetIR37_2: IR37.2 IR_R37.2 | length 497.8
  Top Layer w10: IR37.2@2135.83,1751.97 2161.86,1778 2443,1778 v1@2491,1826
  Bottom Layer w10: IR_R37.2@2480.32,1731.18 2492,1742.86 2492,1818.63 2483.63,1827 v1(2491.46,1827)
NetIR38_2: IR38.2 IR_R38.2 | length 342.3
  Top Layer w10: IR38.2@2604.33,1751.97 2869.51,1751.97 v1(2874.48,1747)
  Bottom Layer w10: v1(2874.48,1747) 2884.02,1756.54 IR_R38.2@2884.02,1813.18
NetIR39_2: IR39.2 IR_R39.2 | length 214.3
  Top Layer w10: IR39.2@3057.09,1751.97 3154.03,1751.97 3172,1734 3175,1737 v1(3171,1741)
  Bottom Layer w10: v1(3171,1741) 3175,1741 3176,1742 3180,1738 3198.82,1756.82 IR_R39.2@3198.82,1801.18
NetIR40_2: IR40.2 IR_R40.2 | length 560.5
  Top Layer w10: v1(3495,1335) 3495,1395 3485.98,1404.02 3485.98,1638.11 3549.21,1701.34 IR40.2@3549.21,1751.97 ; IR40.2@3551.18,1753.94 IR40.2@3553.15,1751.97
  Bottom Layer w10: v1(3495,1335) 3533.46,1296.54 IR_R40.2@3533.46,1240.16
NetIR41_2: IR41.2 IR_R41.2 | length 387.9
  Top Layer w10: v1(108,1335) 104.1,1335 100,1330.9 112.2,1318.69 IR41.2@112.2,1259.84
  Bottom Layer w10: v1(108,1335) 100,1335 99.17,1334.17 99.17,1128.38 127.95,1099.6 IR_R41.2@127.95,1053.15
NetIR42_2: IR42.2 IR_R42.2 | length 377.2
  Top Layer w10: IR42.2@714.57,1259.84 852.47,1259.84 877.32,1235 881,1238.68 v1(881,1251)
  Bottom Layer w10: IR_R42.2@698.82,1240.16 709.47,1240.16 719.31,1250 880,1250 v1(881,1251)
NetIR43_2: IR43.2 IR_R43.2 | length 185.3
  Top Layer w10: IR43.2@1181.1,1259.84 IR43.2@1187.01,1259.84 v1(1279.53,1259.84)
  Bottom Layer w10: IR_R43.2@1200.79,1240.16 1259.84,1240.16 v1(1279.53,1259.84)
NetIR44_2: IR44.2 IR_R44.2 | length 290.4
  Top Layer w10: IR44.2@1670.39,1270 v1(1744,1270)
  Bottom Layer w10: IR_R44.2@1539.53,1240.16 1714.16,1240.16 v1(1744,1270)
NetIR45_2: IR45.2 IR_R45.2 | length 978.7
  Top Layer w10: IR45.2@2131.89,1259 v1(2215,1259) ; v1(2272,975) 2363.3,975 2372.31,965.98 2430.84,965.98 2438.85,974 2527,974 v1(2555,1002)
  Bottom Layer w10: v1(2215,1259) 2272,1202 v1(2272,975) ; IR_R45.2@2484.53,1255 2484.53,1235.47 2505,1215 2505,1045 2548,1002 v1(2555,1002)
NetIR46_2: IR46.2 IR_R46.2 | length 305
  Top Layer w10: IR46.2@2604.33,1259.84 2604.33,1246 2605.33,1247 v1(2821,1247)
  Bottom Layer w10: v1(2821,1247) 2824.98,1247 2844.49,1266.51 IR_R46.2@2844.49,1309.05
NetIR47_2: IR47.2 IR_R47.2 | length 298.7
  Top Layer w10: IR47.2@3056.34,1259.84 3056.34,1195 3204,1195 3199,1190 v1(3199,1178)
  Bottom Layer w10: IR_R47.2@3198.82,1245 3198.82,1178.18 v1(3199,1178)
NetIR48_2: IR48.2 IR_R48.2 | length 243.1
  Top Layer w10: IR48.2@3549.21,1259.84 3549.21,1210.79 v1(3577,1183)
  Bottom Layer w10: IR_R48.2@3529.53,1055 3529.53,1144.53 3568,1183 v1(3577,1183) ; IR_R48.2@3533.46,1053.15 IR_R48.2@3533.46,1055
NetIR49_2: IR49.2 IR_R49.2 | length 205
  Top Layer w10: IR49.2@108.27,807.09 v1(108.27,885.83)
  Bottom Layer w10: v1(108.27,885.83) 127.95,866.14 127.95,826.77 IR_R49.2@127.95,767.72
NetIR50_2: IR50.2 IR_R50.2 | length 194.5
  Top Layer w10: IR50.2@718.5,807.09 777.56,807.09 v1(797.24,787.4)
  Bottom Layer w10: IR_R50.2@698.82,767.72 698.82,767 719.22,787.4 v1(797.24,787.4)
NetIR51_2: IR51.2 IR_R51.2 | length 215.2
  Top Layer w10: IR51.2@1187.01,807.09 1187.01,823.22 v1(1239.77,875.98)
  Bottom Layer w10: IR_R51.2@1200.79,767.72 1200.79,769.35 1239.77,808.34 v1(1239.77,875.98)
NetIR52_2: IR52.2 IR_R52.2 | length 298.8
  Top Layer w10: IR52.2@1663.39,807.09 1722.44,748.03 v1(1732.28,748.03)
  Bottom Layer w10: IR_R52.2@1535.43,767.72 1535.43,767 1711.88,767 1730.85,748.03 v1(1732.28,748.03)
NetIR53_2: IR53.2 IR_R53.2 | length 885.9
  Top Layer w10: IR53.2@2132,816.93 2431.54,816.93 2468.2,853.58 2601.15,853.58 2625,877.43 2625,910.72 v1(2664.28,950)
  Bottom Layer w10: IR_R53.2@2480.32,767.72 2515.28,767.72 2625,877.43 2625,910.72 v1(2664.28,950)
NetIR54_2: IR54.2 IR_R54.2 | length 314.2
  Top Layer w10: IR54.2@2608.27,807.09 2636.18,835 v1(2843,835)
  Bottom Layer w10: v1(2843,835) 2843,769.2 IR_R54.2@2844.49,767.72
NetIR55_2: IR55.2 IR_R55.2 | length 230.3
  Top Layer w10: IR55.2@3061.02,807.09 3088.94,835 v1(3198,835)
  Bottom Layer w10: IR_R55.2@3198.82,767.72 3198.82,834.18 v1(3198,835) 3198,822.06 v1@3198.82,821.25
NetIR56_2: IR56.2 IR_R56.2 | length 277.6
  Top Layer w10: v1(3515,899) 3522.43,899 3530.43,907 3549.21,888.21 IR56.2@3549.21,807.09
  Bottom Layer w10: IR_R56.2@3508.46,772.72 3508.46,892.46 v1(3515,899) 3515,890.93 v1@3525,880.93
NetIR57_2: IR57.2 IR_R57.2 | length 257.3
  Top Layer w10: v1@68.9,393.7 88.58,393.7 127.95,354.33 IR57.2@127.95,295.28
  Bottom Layer w10: v1@68.9,393.7 68.9,354.33 IR_R57.2@127.95,295.28
  other v1: 60,401
NetIR58_2: IR58.2 IR_R58.2 | length 227
  Top Layer w10: IR58.2@715,295.28 722.91,295.28 773,345.36 v1(773,372)
  Bottom Layer w10: IR_R58.2@698.82,295.28 722.91,295.28 773,345.36 v1(773,372)
NetIR59_2: IR59.2 IR_R59.2 | length 205.4
  Top Layer w10: IR59.2@1171.26,295.28 1171.26,298 IR59.2@1177.54,291.72 ; IR59.2@1173.98,295.28 v1@1279.53,295.28
  Bottom Layer w10: IR_R59.2@1200.79,295.28 1200.79,296 1262.13,296 1271.25,305.12 1279.53,296.84 v1@1279.53,295.28
  other v1: 1279.53,307.09
NetIR60_2: IR60.2 IR_R60.2 | length 233.2
  Top Layer w10: v1(1659,409) 1659,415.1 1659.45,415.55 IR60.2@1659.45,314.96
  Bottom Layer w10: IR_R60.2@1535.43,403.54 1653.54,403.54 v1(1659,409)
NetIR61_2: IR61.2 IR_R61.2 | length 429.8
  Top Layer w10: IR61.2@2131.89,314.96 2148.46,331.53 2164.72,331.53 2188.16,354.96 2221.29,354.96 2261.29,314.96 v1(2411.42,314.96)
  Bottom Layer w10: v1(2411.42,314.96) 2480.31,383.86 IR_R61.2@2480.32,403.54
NetIR62_2: IR62.2 IR_R62.2 | length 310
  Top Layer w10: IR62.2@2608.27,314.96 2659.23,264 2743,264 2780,227 v1(2784,227)
  Bottom Layer w10: v1(2784,227) 2784,234.79 IR_R62.2@2844.49,295.28 ; IR_R62.2@2841.32,298.45 IR_R62.2@2844.49,301.62
NetIR63_2: IR63.2 IR_R63.2 | length 250.9
  Top Layer w10: IR63.2@3057.09,314.96 3116.04,314.96 v1(3203,228)
  Bottom Layer w10: IR_R63.2@3198.82,295.28 3198.82,232.18 v1(3203,228)
NetIR64_2: IR64.2 IR_R64.2 | length 216.3
  Top Layer w10: v1(3540,410) 3549.21,400.79 IR64.2@3549.21,314.96
  Bottom Layer w10: IR_R64.2@3533.46,295.28 3533.46,366.33 3540,372.87 v1(3540,410)
NetLED1_CKO: LED1.CKO LED2.CKI | length 401.6
  Top Layer w10: LED1.CKO@212.6,3484.25 LED2.CKI@614.18,3484.25
NetLED1_SDO: LED1.SDO LED2.SDI | length 401.6
  Top Layer w10: LED1.SDO@212.6,3513.78 LED2.SDI@614.18,3513.78
NetLED2_CKO: LED2.CKO LED3.CKI | length 401.6
  Top Layer w10: LED2.CKO@685.04,3484.25 LED3.CKI@1086.62,3484.25
NetLED2_SDO: LED2.SDO LED3.SDI | length 408.9
  Top Layer w10: LED2.SDO@685.04,3513.78 819.65,3513.78 828.43,3505 861.57,3505 870.35,3513.78 LED3.SDI@1086.62,3513.78
NetLED3_CKO: LED3.CKO LED4.CKI | length 407.8
  Top Layer w10: LED3.CKO@1157.48,3484.25 1224.9,3484.25 1229.15,3480 1278.85,3480 1283.1,3484.25 1341.56,3484.25 1344.82,3481 1411.09,3481 1414.34,3484.25 LED4.CKI@1559.06,3484.25
NetLED3_SDO: LED3.SDO LED4.SDI | length 415.7
  Top Layer w10: LED3.SDO@1157.48,3513.78 1223.65,3513.78 1237.43,3500 1270.57,3500 1274.82,3504.25 1349.85,3504.25 1353.1,3501 1402.81,3501 1415.59,3513.78 LED4.SDI@1559.06,3513.78
NetLED4_CKO: LED4.CKO LED5.CKI | length 401.6
  Top Layer w10: LED4.CKO@1629.92,3484.25 LED5.CKI@2031.5,3484.25
NetLED4_SDO: LED4.SDO LED5.SDI | length 401.6
  Top Layer w10: LED4.SDO@1629.92,3513.78 LED5.SDI@2031.5,3513.78
NetLED5_CKO: LED5.CKO LED6.CKI | length 404.3
  Top Layer w10: LED5.CKO@2102.36,3484.25 2247.9,3484.25 2251.15,3481 2300.85,3481 2304.1,3484.25 LED6.CKI@2503.94,3484.25
NetLED5_SDO: LED5.SDO LED6.SDI | length 412.2
  Top Layer w10: LED5.SDO@2102.36,3513.78 2246.65,3513.78 2259.43,3501 2292.57,3501 2305.35,3513.78 LED6.SDI@2503.94,3513.78
NetLED6_CKO: LED6.CKO LED7.CKI | length 381.9
  Top Layer w10: LED6.CKO@2574.8,3484.25 LED7.CKI@2956.7,3484.25
NetLED6_SDO: LED6.SDO LED7.SDI | length 381.9
  Top Layer w10: LED6.SDO@2574.8,3513.78 LED7.SDI@2956.7,3513.78
NetLED7_CKO: LED7.CKO LED8.CKI | length 421.3
  Top Layer w10: LED7.CKO@3027.56,3484.25 LED8.CKI@3448.82,3484.25
NetLED7_SDO: LED7.SDO LED8.SDI | length 401.6
  Top Layer w10: 3047.24,3513.78 LED8.SDI@3448.82,3513.78
NetLED8_CKO: LED8.CKO LED16.CKI | length 604
  Top Layer w10: LED16.CKI@3519.68,3011.81 3572.84,3011.81 3615,3053.98 3615,3425.57 3556.32,3484.25 LED8.CKO@3519.68,3484.25
NetLED8_SDO: LED8.SDO LED16.SDI | length 700.8
  Top Layer w10: LED16.SDI@3519.68,2982.28 3592.52,2982.28 3635,3024.76 3635,3451.61 3572.83,3513.78 LED8.SDO@3519.68,3513.78
NetLED9_CKI: LED9.CKI LED10.CKO | length 406.1
  Top Layer w10: LED9.CKI@212.6,3011.81 215.79,3008.62 614.18,3008.62 LED10.CKO@614.18,3011.81
NetLED9_CKO: LED9.CKO LED17.CKI | length 582.5
  Top Layer w10: LED17.CKI@141.74,2539.37 108.27,2539.37 49.21,2598.43 49.21,2942.91 118.11,3011.81 LED9.CKO@141.74,3011.81
NetLED9_SDI: LED9.SDI LED10.SDO | length 401.6
  Top Layer w10: LED9.SDI@212.6,2982.28 LED10.SDO@614.18,2982.28
NetLED9_SDO: LED9.SDO LED17.SDI | length 487.4
  Top Layer w10: LED17.SDI@141.74,2568.9 126.42,2568.9 73,2622.32 73,2927.33 127.95,2982.28 LED9.SDO@141.74,2982.28
NetLED10_CKI: LED10.CKI LED11.CKO | length 407.5
  Top Layer w10: LED10.CKI@685.04,3011.81 819.41,3011.81 820.05,3011.18 853.18,3011.18 853.81,3011.81 938.69,3011.81 945.15,3005.35 1003.67,3005.35 1010.13,3011.81 LED11.CKO@1086.62,3011.81
NetLED10_SDI: LED10.SDI LED11.SDO | length 401.6
  Top Layer w10: LED10.SDI@685.04,2982.28 LED11.SDO@1086.62,2982.28
NetLED11_CKI: LED11.CKI LED12.CKO | length 406.9
  Top Layer w10: LED11.CKI@1157.48,3011.81 1411.13,3011.81 1417.59,3005.35 1503.57,3005.35 1510.03,3011.81 LED12.CKO@1559.06,3011.81
NetLED11_SDI: LED11.SDI LED12.SDO | length 401.6
  Top Layer w10: LED11.SDI@1157.48,2982.28 LED12.SDO@1559.06,2982.28
NetLED12_CKI: LED12.CKI LED13.CKO | length 406.1
  Top Layer w10: LED12.CKI@1629.92,3011.81 1633.11,3008.62 2031.5,3008.62 LED13.CKO@2031.5,3011.81
NetLED12_SDI: LED12.SDI LED13.SDO | length 403.8
  Top Layer w10: LED12.SDI@1629.92,2982.28 1632.64,2985 2028.78,2985 LED13.SDO@2031.5,2982.28
NetLED13_CKI: LED13.CKI LED14.CKO | length 410.5
  Top Layer w10: LED13.CKI@2102.36,3011.81 2422.88,3011.81 2433.67,3001.02 2466.81,3001.02 2474.41,3008.62 2500.75,3008.62 LED14.CKO@2503.94,3011.81
NetLED13_SDI: LED13.SDI LED14.SDO | length 402.6
  Top Layer w10: LED13.SDI@2102.36,2982.28 2103.62,2981.02 2502.68,2981.02 LED14.SDO@2503.94,2982.28
NetLED14_CKI: LED14.CKI LED15.CKO | length 389.1
  Top Layer w10: LED14.CKI@2574.8,3011.81 2581.26,3005.35 2873.75,3005.35 2877.02,3008.62 2956.7,3008.62 LED15.CKO@2956.7,3011.81
NetLED14_SDI: LED14.SDI LED15.SDO | length 381.9
  Top Layer w10: LED14.SDI@2574.8,2982.28 LED15.SDO@2956.7,2982.28
NetLED15_CKI: LED15.CKI LED16.CKO | length 426.6
  Top Layer w10: LED15.CKI@3027.56,3011.81 3300.9,3011.81 3307.35,3005.35 3365.88,3005.35 3372.33,3011.81 LED16.CKO@3448.82,3011.81
NetLED15_SDI: LED15.SDI LED16.SDO | length 421.3
  Top Layer w10: LED15.SDI@3027.56,2982.28 LED16.SDO@3448.82,2982.28
NetLED17_CKO: LED17.CKO LED18.CKI | length 401.6
  Top Layer w10: LED17.CKO@212.6,2539.37 LED18.CKI@614.18,2539.37
NetLED17_SDO: LED17.SDO LED18.SDI | length 401.6
  Top Layer w10: LED17.SDO@212.6,2568.9 LED18.SDI@614.18,2568.9
NetLED18_CKO: LED18.CKO LED19.CKI | length 404.5
  Top Layer w10: LED18.CKO@685.04,2539.37 688.54,2535.87 1083.11,2535.87 LED19.CKI@1086.62,2539.37
NetLED18_SDO: LED18.SDO LED19.SDI | length 401.6
  Top Layer w10: LED18.SDO@685.04,2568.9 LED19.SDI@1086.62,2568.9
NetLED19_CKO: LED19.CKO LED20.CKI | length 410.4
  Top Layer w10: LED19.CKO@1157.48,2539.37 1160.98,2535.87 1353.3,2535.87 1360.43,2543 1440.57,2543 1447.7,2535.87 1555.55,2535.87 LED20.CKI@1559.06,2539.37
NetLED19_SDO: LED19.SDO LED20.SDI | length 401.6
  Top Layer w10: LED19.SDO@1157.48,2568.9 LED20.SDI@1559.06,2568.9
NetLED20_CKO: LED20.CKO LED21.CKI | length 401.6
  Top Layer w10: LED20.CKO@1629.92,2539.37 LED21.CKI@2031.5,2539.37
NetLED20_SDO: LED20.SDO LED21.SDI | length 401.6
  Top Layer w10: LED20.SDO@1629.92,2568.9 LED21.SDI@2031.5,2568.9
NetLED21_CKO: LED21.CKO LED22.CKI | length 401.6
  Top Layer w10: LED21.CKO@2102.36,2539.37 LED22.CKI@2503.94,2539.37
NetLED21_SDO: LED21.SDO LED22.SDI | length 401.6
  Top Layer w10: LED21.SDO@2102.36,2568.9 LED22.SDI@2503.94,2568.9
NetLED22_CKO: LED22.CKO LED23.CKI | length 384.8
  Top Layer w10: LED22.CKO@2574.8,2539.37 2578.3,2535.87 2953.19,2535.87 LED23.CKI@2956.7,2539.37
NetLED22_SDO: LED22.SDO LED23.SDI | length 381.9
  Top Layer w10: LED22.SDO@2574.8,2568.9 LED23.SDI@2956.7,2568.9
NetLED23_CKO: LED23.CKO LED24.CKI | length 433.2
  Top Layer w10: LED23.CKO@3027.56,2539.37 3202.35,2539.37 3216.72,2525 3385.63,2525 3400,2539.37 LED24.CKI@3448.82,2539.37
NetLED23_SDO: LED23.SDO LED24.SDI | length 441.1
  Top Layer w10: LED23.SDO@3027.56,2568.9 3219.53,2568.9 3243.43,2545 3375,2545 3398.9,2568.9 LED24.SDI@3448.82,2568.9
NetLED24_CKO: LED24.CKO LED32.CKI | length 559.4
  Top Layer w10: LED32.CKI@3519.68,2066.93 3543.31,2066.93 3595,2118.62 3595,2482.31 3537.94,2539.37 LED24.CKO@3519.68,2539.37
NetLED24_SDO: LED24.SDO LED32.SDI | length 643.9
  Top Layer w10: LED32.SDI@3519.68,2037.4 3553.15,2037.4 3615,2099.25 3615,2497.2 3543.3,2568.9 LED24.SDO@3519.68,2568.9
NetLED25_CKI: LED25.CKI LED26.CKO | length 406.1
  Top Layer w10: LED25.CKI@212.6,2066.93 215.79,2063.74 614.18,2063.74 LED26.CKO@614.18,2066.93
NetLED25_CKO: LED25.CKO LED33.CKI | length 585.4
  Top Layer w10: LED33.CKI@141.74,1594.49 108.27,1594.49 45.71,1657.05 45.71,1994.53 49.21,1998.03 118.11,2066.93 LED25.CKO@141.74,2066.93
NetLED25_SDI: LED25.SDI LED26.SDO | length 404.6
  Top Layer w10: LED25.SDI@212.6,2037.4 216.2,2041 610.58,2041 LED26.SDO@614.18,2037.4
NetLED25_SDO: LED25.SDO LED33.SDI | length 496.1
  Top Layer w10: LED33.SDI@141.74,1624.02 108.09,1624.02 65.71,1666.4 65.71,1961.37 LED25.SDO@141.74,2037.4
NetLED26_CKI: LED26.CKI LED27.CKO | length 414.6
  Top Layer w10: LED26.CKI@685.04,2066.93 948.53,2066.93 954.99,2060.47 1013.51,2060.47 1019.97,2066.93 1083.43,2066.93 LED27.CKO@1086.62,2063.74 ; LED27.CKO@1086.62,2063.74 LED27.CKO@1086.62,2066.93 LED27.CKO@1086.62,2063.74
NetLED26_SDI: LED26.SDI LED27.SDO | length 401.6
  Top Layer w10: LED26.SDI@685.04,2037.4 LED27.SDO@1086.62,2037.4
NetLED27_CKI: LED27.CKI LED28.CKO | length 408.8
  Top Layer w10: LED27.CKI@1157.48,2066.93 1420.97,2066.93 1427.43,2060.47 1485.95,2060.47 1489.22,2063.74 1559.06,2063.74 LED28.CKO@1559.06,2066.93
NetLED27_SDI: LED27.SDI LED28.SDO | length 401.6
  Top Layer w10: LED27.SDI@1157.48,2037.4 LED28.SDO@1559.06,2037.4
NetLED28_CKI: LED28.CKI LED29.CKO | length 423.3
  Top Layer w10: LED28.CKI@1629.92,2066.93 1633.11,2063.74 1662.69,2063.74 1683.43,2043 1716.57,2043 1737.31,2063.74 2031.5,2063.74 LED29.CKO@2031.5,2066.93
NetLED28_SDI: LED28.SDI LED29.SDO | length 413.5
  Top Layer w10: LED28.SDI@1629.92,2037.4 1660.75,2037.4 1675.15,2023 1724.85,2023 1739.25,2037.4 LED29.SDO@2031.5,2037.4
NetLED29_CKI: LED29.CKI LED30.CKO | length 406.9
  Top Layer w10: LED29.CKI@2102.36,2066.93 2209.79,2066.93 2216.24,2060.47 2430.84,2060.47 2437.29,2066.93 LED30.CKO@2503.94,2066.93
NetLED29_SDI: LED29.SDI LED30.SDO | length 401.6
  Top Layer w10: LED29.SDI@2102.36,2037.4 LED30.SDO@2503.94,2037.4
NetLED30_CKI: LED30.CKI LED31.CKO | length 381.9
  Top Layer w10: LED30.CKI@2574.8,2066.93 LED31.CKO@2956.7,2066.93
NetLED30_SDI: LED30.SDI LED31.SDO | length 381.9
  Top Layer w10: LED30.SDI@2574.8,2037.4 LED31.SDO@2956.7,2037.4
NetLED31_CKI: LED31.CKI LED32.CKO | length 426.6
  Top Layer w10: LED31.CKI@3027.56,2066.93 3310.74,2066.93 3317.2,2060.47 3375.72,2060.47 3382.18,2066.93 LED32.CKO@3448.82,2066.93
NetLED31_SDI: LED31.SDI LED32.SDO | length 421.3
  Top Layer w10: LED31.SDI@3027.56,2037.4 LED32.SDO@3448.82,2037.4
NetLED33_CKO: LED33.CKO LED34.CKI | length 416.3
  Top Layer w10: LED33.CKO@212.6,1594.49 216.1,1590.98 351.13,1590.98 365.42,1605.28 421.57,1605.28 435.86,1590.98 610.67,1590.98 LED34.CKI@614.18,1594.49
NetLED33_SDO: LED33.SDO LED34.SDI | length 402.6
  Top Layer w10: LED33.SDO@212.6,1624.02 213.85,1625.28 612.92,1625.28 LED34.SDI@614.18,1624.02
NetLED34_CKO: LED34.CKO LED35.CKI | length 404.5
  Top Layer w10: LED34.CKO@685.04,1594.49 688.54,1590.98 1083.11,1590.98 LED35.CKI@1086.62,1594.49
NetLED34_SDO: LED34.SDO LED35.SDI | length 401.6
  Top Layer w10: LED34.SDO@685.04,1624.02 LED35.SDI@1086.62,1624.02
NetLED35_CKO: LED35.CKO LED36.CKI | length 404.5
  Top Layer w10: LED35.CKO@1157.48,1594.49 1160.98,1590.98 1555.55,1590.98 LED36.CKI@1559.06,1594.49
NetLED35_SDO: LED35.SDO LED36.SDI | length 410.7
  Top Layer w10: LED35.SDO@1157.48,1624.02 1212.13,1624.02 1223.15,1613 1272.85,1613 1283.87,1624.02 LED36.SDI@1559.06,1624.02
NetLED36_CKO: LED36.CKO LED37.CKI | length 431.8
  Top Layer w10: LED36.CKO@1629.92,1594.49 1630.41,1594 1765.43,1594 1798.43,1627 1831.57,1627 1867.58,1590.98 2028,1590.98 LED37.CKI@2031.5,1594.49
NetLED36_SDO: LED36.SDO LED37.SDI | length 421.1
  Top Layer w10: LED36.SDO@1629.92,1624.02 1630.24,1623.7 1766.85,1623.7 1790.15,1647 1839.85,1647 1863.15,1623.7 1902.33,1623.7 1902.65,1624.02 LED37.SDI@2031.5,1624.02